# EAGLE board HF_Receiver_noUSB (EAGLE 7.6.0)
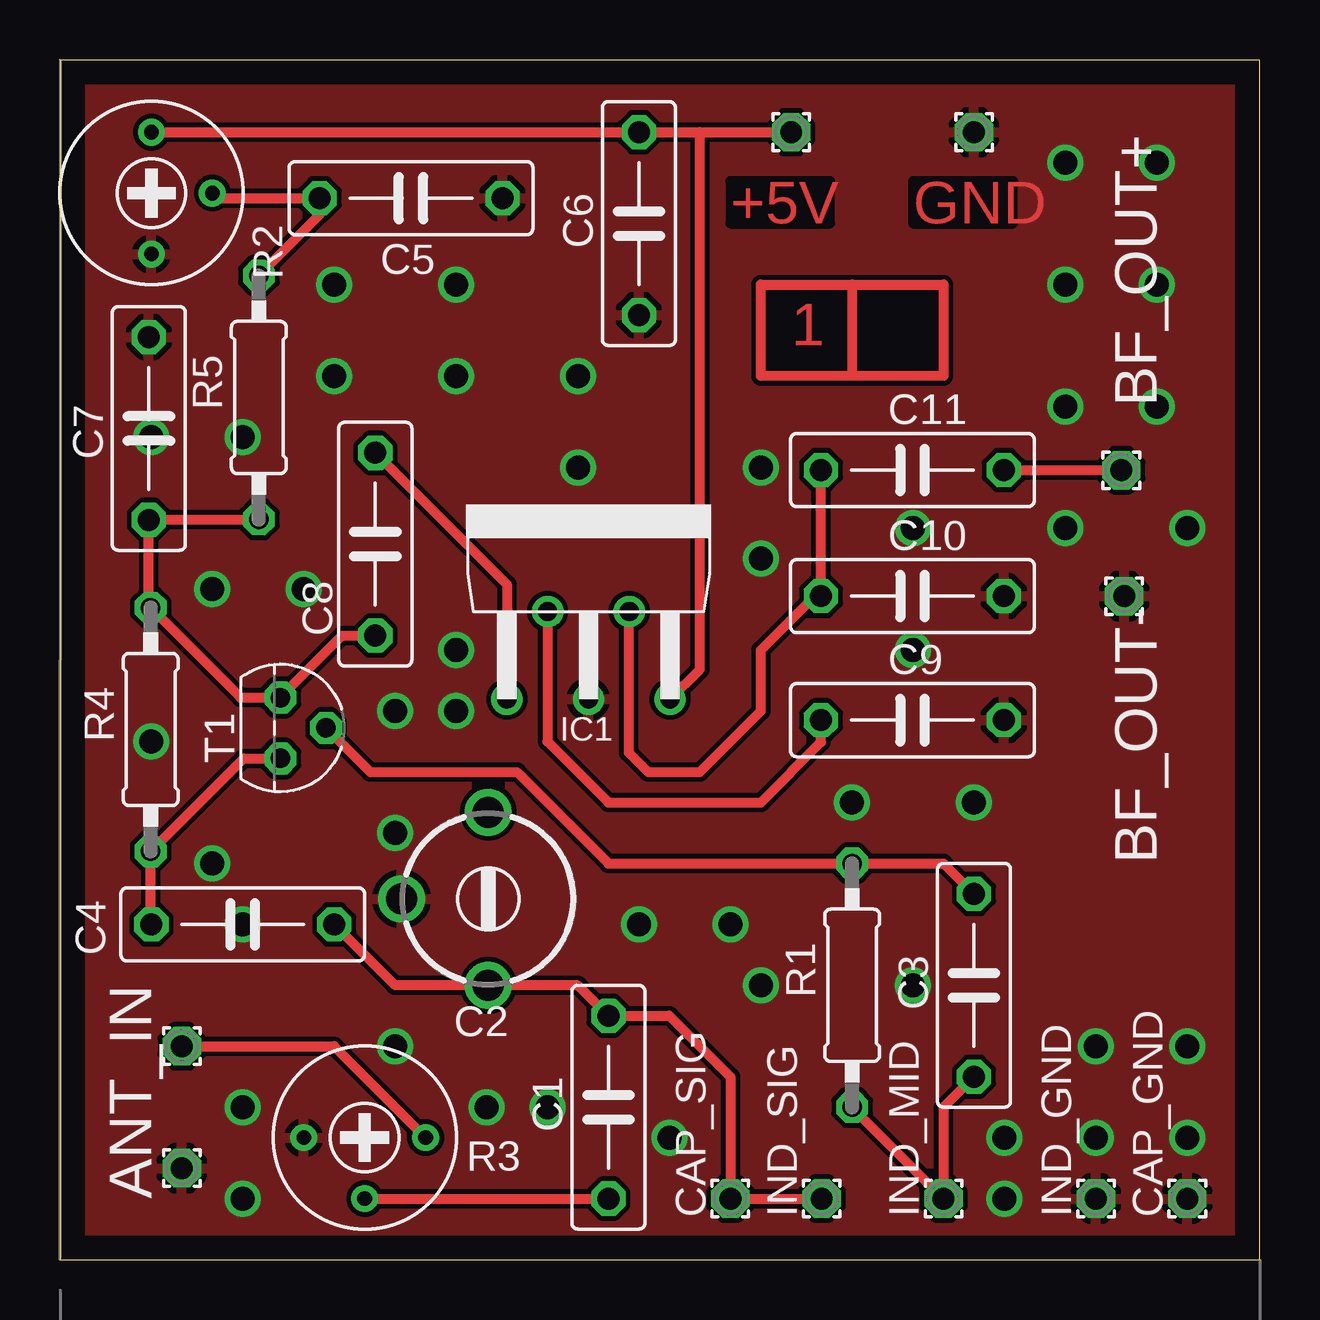
[diagram p0: board, top side]
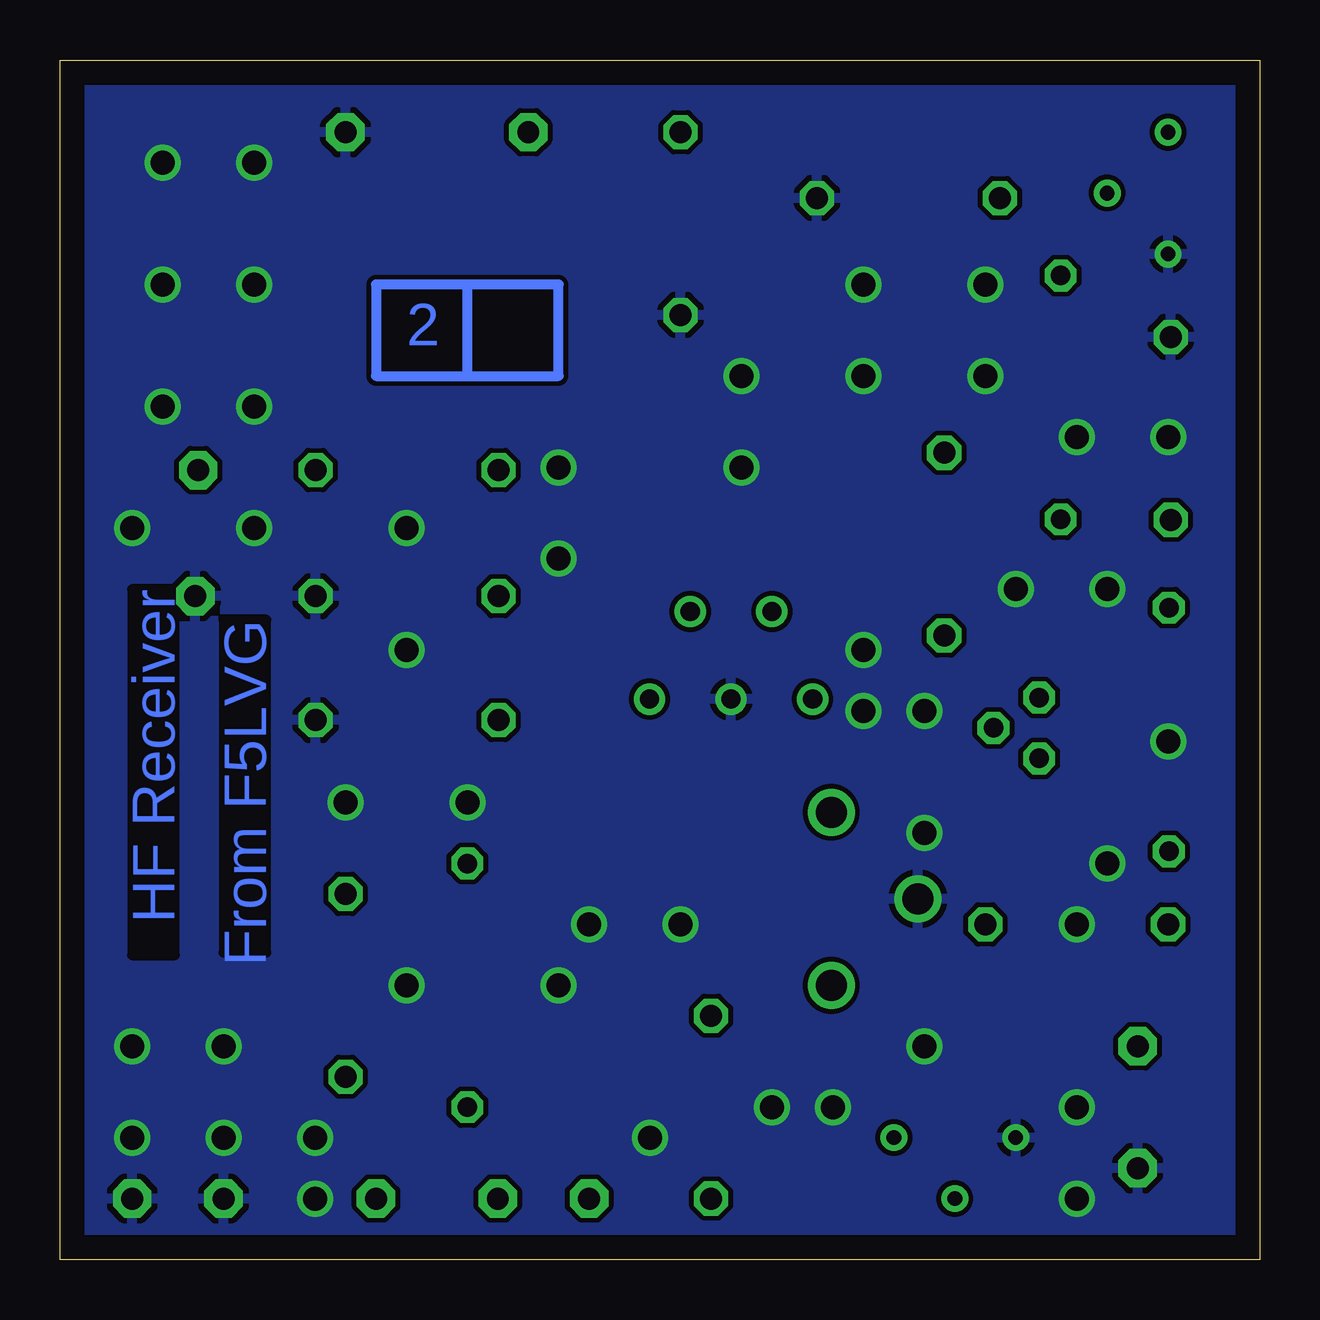
[diagram p1: board, bottom side, seen from below]

Size 50 x 50 mm. Coordinates in mm from the lower left corner, seen from the top.
Outline: 0,0 50,0 50,50 0,50 0,0
Copper layers (1*16): Top 0.035mm / dielectric 1.5mm / Bottom 0.035mm
Design rules "default *": minimum track width 0.1mm, minimum drill 24mil, track to track 8mil, track to pad 8mil, pad to pad 8mil, via to via 8mil, smd to smd 8mil, copper to edge 40mil, drill to drill 8mil, minimum pad ring 10mil, minimum via ring 8mil, stop-mask expansion 4mil, vias tented up to drill 0mil, thermal gap 10mil

## Footprints (pad centres in the part's own frame; a part is rotated, then mirrored left to right if it is on the bottom)
1,6/0,9 = drill 0.914 pad 1.6 octagon: 1 0,0
C075-032X103 = drill 0.914 octagon: 1 -3.81,0; 2 3.81,0
CTRIM808-BC = drill 1.3: 1 -3.607,0; 2 0,3.607; 3 3.607,0
PENTAWATT-V = drill 0.8: 1 -3.4,-3.81; 2 -1.7,-0.16; 3 0,-3.81; 4 1.7,-0.16; 5 3.4,-3.81
0207/10 = drill 0.813 octagon: 1 -5.08,0; 2 5.08,0
RTRIM3339P = drill 0.61: 1 -2.54,0; 2 0,-2.54; 3 2.54,0
TO92 = drill 0.813 octagon: 1 1.27,0; 2 0,1.905; 3 -1.27,0

## Placement (x,y rotation side)
ANT_GND  1,6  [1,6/0,9]  5.08,3.81 0 top
ANT_IN  1,6  [1,6/0,9]  5.08,8.89 0 top
BF_OUT+  1,6  [1,6/0,9]  44.24,32.9 0 top
BF_OUT-  1,6  [1,6/0,9]  44.36,27.65 0 top
C1  2n  [C075-032X103]  22.86,6.35 90 top
C2  10p  [CTRIM808-BC]  17.85,15.03 90 top
C3  100p  [C075-032X103]  38.1,11.43 90 top
C4  100n  [C075-032X103]  7.62,13.97 180 top
C5  4,7u  [C075-032X103]  14.63,44.24 180 top
C6  1000u  [C075-032X103]  24.13,43.18 90 top
C7  47n  [C075-032X103]  3.71,34.64 270 top
C8  100n  [C075-032X103]  13.14,29.82 270 top
C9  4,7u  [C075-032X103]  35.53,22.48 0 top
C10  4,7u  [C075-032X103]  35.53,27.65 0 top
C11  4,7u  [C075-032X103]  35.53,32.9 0 top
CAP_GND  1,6  [1,6/0,9]  46.99,2.54 90 top
CAP_SIG  1,6  [1,6/0,9]  27.94,2.54 90 top
GND  1,6  [1,6/0,9]  38.1,46.99 0 top
IC1  TDA2003  [PENTAWATT-V]  22.03,27.17 0 top
IND_GND  1,6  [1,6/0,9]  43.18,2.54 90 top
IND_MID  1,6  [1,6/0,9]  36.83,2.54 90 top
IND_SIG  1,6  [1,6/0,9]  31.75,2.54 90 top
R1  4,7k  [0207/10]  33.02,11.43 90 top
R2  47k  [RTRIM3339P]  3.81,44.45 90 top
R3  1k  [RTRIM3339P]  12.7,5.08 0 top
R4  100k  [0207/10]  3.78,22.09 90 top
R5  22k  [0207/10]  8.29,35.93 90 top
T1  BF199  [TO92]  9.19,22.16 270 top
VCC  1,6  [1,6/0,9]  30.48,46.99 0 top

## Library data of the parts
ANT_GND ANT_IN BF_OUT+ BF_OUT- CAP_GND CAP_SIG GND IND_GND IND_MID IND_SIG VCC = wirepad
C1 C3-C11 R1-R5 = resistor
C2 = rcl
IC1 = tda2003
T1 = transistor

## Nets
GND: ANT_GND.1 BF_OUT-.1 C2.2 C5.1 C6.1 C7.1 C9.2 C10.2 CAP_GND.1 GND.1 IC1.3 IND_GND.1 R2.1 R3.1
N$1: ANT_IN.1 R3.3
N$3: C1.1 R3.2
N$4: C1.2 C2.1 C4.1 CAP_SIG.1 IND_SIG.1
N$5: C3.1 IND_MID.1 R1.1
N$6: C3.2 R1.2 T1.2
N$7: C4.2 R4.1 T1.1
N$8: C8.1 IC1.1
N$9: C7.2 C8.2 R4.2 R5.1 T1.3
N$11: C5.2 R2.2 R5.2
N$12: C9.1 IC1.2
N$13: C10.1 C11.1 IC1.4
N$14: BF_OUT+.1 C11.2
VCC: C6.2 IC1.5 R2.3 VCC.1

## Tracks (layer width: path | path; a pad name or v marks a point on that pad's centre or on a via)
GND  (via drill 1)
  other vias: 41.91,45.72 45.72,45.72 41.91,40.64 45.72,40.64 45.72,35.56 41.91,35.56 46.99,30.48 41.91,30.48 35.56,30.48 29.21,29.21 29.21,33.02 35.56,25.4 38.1,19.05 33.02,19.05 21.59,33.02 21.59,36.83 16.51,36.83 16.51,40.64 11.43,40.64 11.43,36.83 7.62,34.29 3.81,34.29 6.35,27.94 10.16,27.94 3.81,21.59 13.97,22.86 16.51,22.86 16.51,25.4 6.35,16.51 7.62,13.97 7.62,6.35 7.62,2.54 13.97,8.89 13.97,17.78 24.13,13.97 27.94,13.97 29.21,11.43 25.4,5.08 20.32,6.35 17.78,6.35 35.56,11.43 39.37,5.08 39.37,2.54 43.18,5.08 43.18,8.89 46.99,8.89 46.99,5.08
  pour Top: 0,50 0,0 50,0 50,50
  pour Bottom: 0,50 0,0 50,0 50,50
N$1
  Top 0.406: ANT_IN.1 11.43,8.89 R3.3
N$3
  Top 0.406: R3.2 C1.1
N$4
  Top 0.406: IND_SIG.1 CAP_SIG.1 27.94,7.62 25.4,10.16 C1.2 21.59,11.43 C2.1 13.97,11.43 C4.1
N$5
  Top 0.406: R1.1 IND_MID.1 36.83,6.35 C3.1
N$6
  Top 0.406: T1.2 12.93,20.32 19.05,20.32 22.86,16.51 R1.2 36.83,16.51 C3.2
N$7
  Top 0.406: C4.2 3.78,14 R4.1 7.65,20.89 T1.1
N$8
  Top 0.406: C8.1 18.63,28.14 IC1.1
N$9
  Top 0.406: R5.1 3.72,30.85 C7.2 3.71,27.25 R4.2 7.53,23.43 T1.3 11.77,26.01 C8.2
N$10
  Top 0.406: 33.02,40.64 29.21,40.64 29.21,36.83 33.02,36.83 | 33.02,40.64 36.83,40.64 36.83,36.83 33.02,36.83 | 33.02,40.64 33.02,36.83
N$11
  Top 0.406: R5.2 10.82,43.55 C5.2 6.56,44.24 R2.2
N$12
  Top 0.406: IC1.2 20.32,27 20.32,21.59 22.86,19.05 29.21,19.05 31.72,21.56 C9.1
N$13
  Top 0.406: IC1.4 23.7,26.98 23.7,21.13 24.51,20.32 26.67,20.32 29.21,22.86 29.21,25.4 31.46,27.65 C10.1 C11.1
N$14
  Top 0.406: C11.2 BF_OUT+.1
N$40
  Bottom 0.406: 33.02,40.64 29.21,40.64 29.21,36.83 33.02,36.83 | 33.02,40.64 36.83,40.64 36.83,36.83 33.02,36.83 | 33.02,36.83 33.02,40.64
VCC
  Top 0.406: R2.3 C6.2 26.67,46.99 | 26.67,46.99 VCC.1 | IC1.5 26.67,24.6 26.67,46.99

## Text on the board
Top: +5V | GND | 1
Bottom: 2 | HF Receiver | From F5LVG
tPlace: BF_OUT+ | BF_OUT- | ANT_IN